# EAGLE board rescue (EAGLE 9.5.1)

Size 100 x 100 mm. Coordinates in mm from the lower left corner, seen from the top.
Outline: 0,0 100,0 100,100 0,100 0,0
Copper layers (1*16): Top 0.035mm / dielectric 1.5mm / Bottom 0.035mm
Design rules "default": minimum track width 6mil, minimum drill 0.35mm, track to track 6mil, track to pad 6mil, pad to pad 6mil, via to via 6mil, smd to smd 6mil, copper to edge 40mil, drill to drill 6mil, minimum pad ring 10mil, minimum via ring 8mil, stop-mask expansion 4mil, vias tented up to drill 0mil, thermal gap 10mil

## Footprints (pad centres in the part's own frame; a part is rotated, then mirrored left to right if it is on the bottom)
PUSHBUTTON-KMR241GLFS = smd 1 x 1: P$1 2.1,0.8; P$2 2.1,-0.8; P$3 -2.1,0.8; P$4 -2.1,-0.8
EIA3216 = smd 1.4 x 1.6: A 1.4,0; C -1.4,0
0805 = smd 0.8 x 1.2: 1 -0.9,0; 2 0.9,0
C0402 = smd 0.7 x 0.9: 1 -0.65,0; 2 0.65,0
LED-1206 = smd 1.2 x 1.4: A -1.5,0; C 1.5,0
SOD-323 = smd 0.63 x 0.83: 1 -1.15,0; 2 1.15,0
SOT23 = smd 0.8 x 0.9: 1 -0.95,-1; 2 0.95,-1; 3 0,1.1
USB-B-PTH = drill 0.914 pad 1.676: D+ 4,1.25; D- 5.981,1.25; GND 4,-1.25; VBUS 5.981,-1.25 | drill 2.286: SHLD1 1.282,-6.02; SHLD2 1.282,6.02
0603 = smd 1.1 x 1: 1 -0.85,0; 2 0.85,0
CRYSTAL-SMD-5X3 = smd 1.9 x 1.1: 1 -1.85,-1.15; 2 1.85,-1.15; 3 1.85,1.15; 4 -1.85,1.15
SOT23' = smd 1 x 1.4: 1 -0.95,-1.1; 2 0.95,-1.1; 3 0,1.1
SSOP24 = smd 0.348 x 1.397: 1 -3.575,-3.656; 2 -2.925,-3.656; 3 -2.275,-3.656; 4 -1.625,-3.656; 5 -0.975,-3.656; 6 -0.325,-3.656; 7 0.325,-3.656; 8 0.975,-3.656; 9 1.625,-3.656; 10 2.275,-3.656; 11 2.925,-3.656; 12 3.575,-3.656; 13 3.575,3.656; 14 2.925,3.656; 15 2.275,3.656; 16 1.625,3.656; 17 0.975,3.656; 18 0.325,3.656; 19 -0.325,3.656; 20 -0.975,3.656; 21 -1.625,3.656; 22 -2.275,3.656; 23 -2.925,3.656; 24 -3.575,3.656
LQFP48 = smd 0.254 x 1: 1 -2.75,-4.25; 2 -2.25,-4.25; 3 -1.75,-4.25; 4 -1.25,-4.25; 5 -0.75,-4.25; 6 -0.25,-4.25; 7 0.25,-4.25; 8 0.75,-4.25; 9 1.25,-4.25; 10 1.75,-4.25; 11 2.25,-4.25; 12 2.75,-4.25; 25 2.75,4.25; 26 2.25,4.25; 27 1.75,4.25; 28 1.25,4.25; 29 0.75,4.25; 30 0.25,4.25; 31 -0.25,4.25; 32 -0.75,4.25; 33 -1.25,4.25; 34 -1.75,4.25; 35 -2.25,4.25; 36 -2.75,4.25 | smd 1 x 0.254: 13 4.25,-2.75; 14 4.25,-2.25; 15 4.25,-1.75; 16 4.25,-1.25; 17 4.25,-0.75; 18 4.25,-0.25; 19 4.25,0.25; 20 4.25,0.75; 21 4.25,1.25; 22 4.25,1.75; 23 4.25,2.25; 24 4.25,2.75; 37 -4.25,2.75; 38 -4.25,2.25; 39 -4.25,1.75; 40 -4.25,1.25; 41 -4.25,0.75; 42 -4.25,0.25; 43 -4.25,-0.25; 44 -4.25,-0.75; 45 -4.25,-1.25; 46 -4.25,-1.75; 47 -4.25,-2.25; 48 -4.25,-2.75

## Placement (x,y rotation side)
BUT  KMR211GLFS  [PUSHBUTTON-KMR241GLFS]  20.32,-36.83 0 top  (outside the outline)
C1  100uF  [EIA3216]  22.86,-40.64 0 top  (outside the outline)
C2  10uF  [0805]  13.97,-40.64 0 top  (outside the outline)
C3  10uF  [0805]  17.78,-40.64 0 top  (outside the outline)
C4  1uF  [C0402]  33.02,-40.64 0 top  (outside the outline)
C5  1uF  [C0402]  36.83,-40.64 0 top  (outside the outline)
C6  1uF  [C0402]  40.64,-40.64 0 top  (outside the outline)
C7  1uF  [C0402]  44.45,-40.64 0 top  (outside the outline)
C8  18pF  [C0402]  6.35,-45.72 0 top  (outside the outline)
C9  18pF  [C0402]  10.16,-45.72 0 top  (outside the outline)
C10  47pF  [C0402]  13.97,-45.72 0 top  (outside the outline)
C11  47pF  [C0402]  17.78,-45.72 0 top  (outside the outline)
D1  Blue  [LED-1206]  34.29,-35.56 0 top  (outside the outline)
D2  [SOD-323]  25.4,-49.53 0 top  (outside the outline)
IC1  MCP1703T-3302E/CB  [SOT23]  39.37,-35.56 0 top  (outside the outline)
IC2  MCP1703T-3302E/CB  [SOT23]  6.35,-41.91 0 top  (outside the outline)
J3  USB_B_PTH  [USB-B-PTH]  12.7,-59.69 0 top  (outside the outline)
L1  ferrite bead  [0603]  27.94,-40.64 0 top  (outside the outline)
OSC  8MHz  [CRYSTAL-SMD-5X3]  7.62,-35.56 0 top  (outside the outline)
Q1  NPN-BJT  [SOT23']  25.4,-35.56 0 top  (outside the outline)
Q2  NPN-BJT  [SOT23']  29.21,-35.56 0 top  (outside the outline)
R1  1k  [C0402]  21.59,-45.72 0 top  (outside the outline)
R2  1k  [C0402]  25.4,-45.72 0 top  (outside the outline)
R3  10k  [C0402]  29.21,-45.72 0 top  (outside the outline)
R4  1k  [C0402]  33.02,-45.72 0 top  (outside the outline)
R5  1k  [C0402]  36.83,-45.72 0 top  (outside the outline)
R6  22  [C0402]  40.64,-45.72 0 top  (outside the outline)
R7  22  [C0402]  44.45,-45.72 0 top  (outside the outline)
R8  10k  [C0402]  6.35,-49.53 0 top  (outside the outline)
R9  10k  [C0402]  10.16,-49.53 0 top  (outside the outline)
R10  1.5k  [C0402]  13.97,-49.53 0 top  (outside the outline)
R11  36k  [C0402]  17.78,-49.53 0 top  (outside the outline)
R12  47k  [C0402]  21.59,-49.53 0 top  (outside the outline)
RESET  KMR211GLFS  [PUSHBUTTON-KMR241GLFS]  13.97,-36.83 0 top  (outside the outline)
U$1  TB6612FNG  [SSOP24]  34.29,-21.59 0 top  (outside the outline)
UC1  STM32F103CBT6  [LQFP48]  19.05,-10.16 0 top  (outside the outline)

## Library data of the parts
BUT IC1 IC2 RESET = okie
C1 D2 L1 = SparkFun3
C2 C3 OSC Q1 Q2 = SparkFun2
C4-C11 D1 R1-R12 = SparkFun
J3 = SparkFun-Connectors; PROD_ID: CONN-08278; SF_ID: PRT-00139
U$1 = SparkFun-IC-Special-Function; PROD_ID: IC-09363; SPICEPREFIX: U
UC1 = stm32

## Nets
0: UC1.22
1: UC1.21
2: UC1.20
3: UC1.18
4: UC1.17
5: UC1.16
6: UC1.15
7: UC1.14
8: UC1.13
9: UC1.12
10: UC1.11
11: UC1.10
12: UC1.4
12V: C1.A D2.1 IC1.3 IC2.3
13: UC1.3
14: UC1.2
15: UC1.43
16: UC1.42
17: UC1.41
18: UC1.40
19: UC1.39
20: UC1.38
21: UC1.37
22: UC1.34
23_USBDP: C11.2 R7.1 R10.1 UC1.33
24_USBDM: C10.2 R6.1 UC1.32
25: UC1.31
26: UC1.30
27: UC1.29
28: UC1.28
29: UC1.27
30: UC1.26
31: UC1.25
32: BUT.P$2 BUT.P$4 R9.2 UC1.44 UC1.45
33: R1.2 UC1.19
AV-: C3.2 C4.2 IC2.1 L1.1 UC1.8
DISC: R5.1 UC1.46
GND: C1.C C2.2 C5.2 C6.2 C7.2 C8.2 C9.2 C10.1 C11.1 D1.C IC1.1 J3.GND L1.2 Q1.2 R4.1 R9.1 R11.1 UC1.23 UC1.35 UC1.47
N$1: BUT.P$1 BUT.P$3 R2.1
N$2: D1.A R1.1
N$4: R4.2 RESET.P$1 RESET.P$3
N$51: Q2.2 R10.2
N$59: J3.D- R6.2
N$60: J3.D+ R7.2
N$71: Q1.3 Q2.1 R8.1 R11.2
N$73: Q1.1 R5.2 R12.1
OSC_IN: C9.1 OSC.3 UC1.5
OSC_OUT: C8.1 OSC.1 UC1.6
RESET: R3.1 RESET.P$2 RESET.P$4 UC1.7
V_USB: D2.2 J3.VBUS R8.2
VBAT: UC1.1
VCC: C2.1 C5.1 C6.1 C7.1 IC1.2 Q2.3 R2.2 R3.2 R12.2 UC1.24 UC1.36 UC1.48
VCCA: C3.1 C4.1 IC2.2 UC1.9

## Tracks (layer width: path | path; a pad name or v marks a point on that pad's centre or on a via)
12V  (3 unrouted)
23_USBDP  (3 unrouted)
24_USBDM  (2 unrouted)
32  (4 unrouted)
33  (1 unrouted)
AV-  (4 unrouted)
DISC  (1 unrouted)
GND  (19 unrouted)
N$1  (2 unrouted)
N$2  (1 unrouted)
N$4  (2 unrouted)
N$51  (1 unrouted)
N$59  (1 unrouted)
N$60  (1 unrouted)
N$71  (3 unrouted)
N$73  (2 unrouted)
OSC_IN  (2 unrouted)
OSC_OUT  (2 unrouted)
RESET  (3 unrouted)
V_USB  (2 unrouted)
VCC  (11 unrouted)
VCCA  (3 unrouted)